# EAGLE board dcdc_0424 (EAGLE 9.6.2)
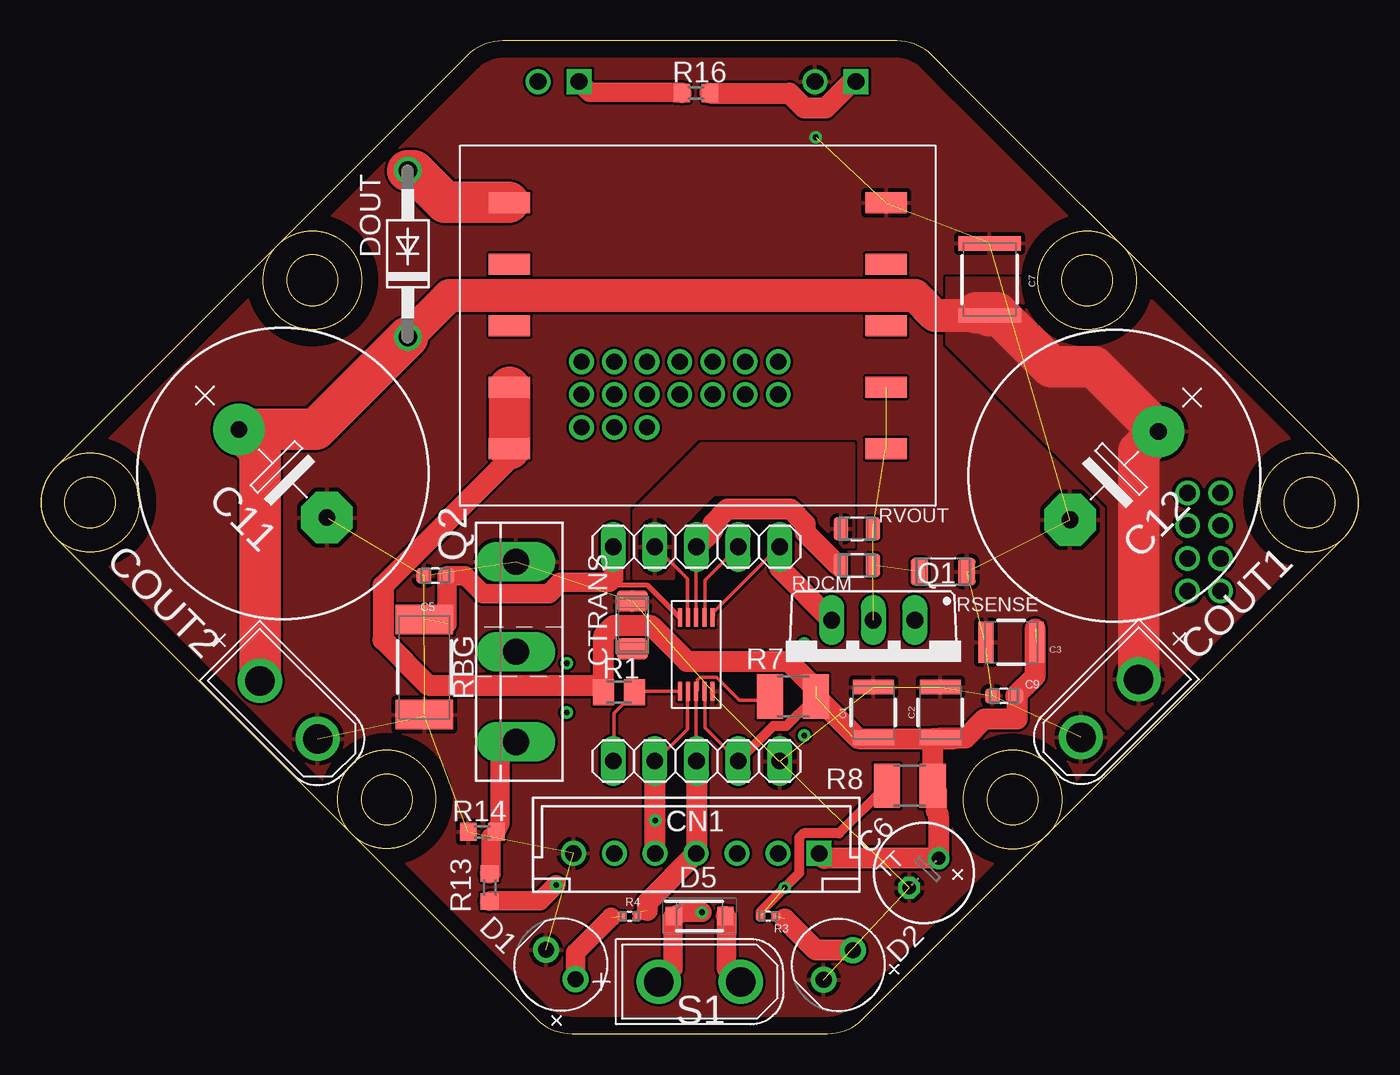
[diagram p0: board, top side]
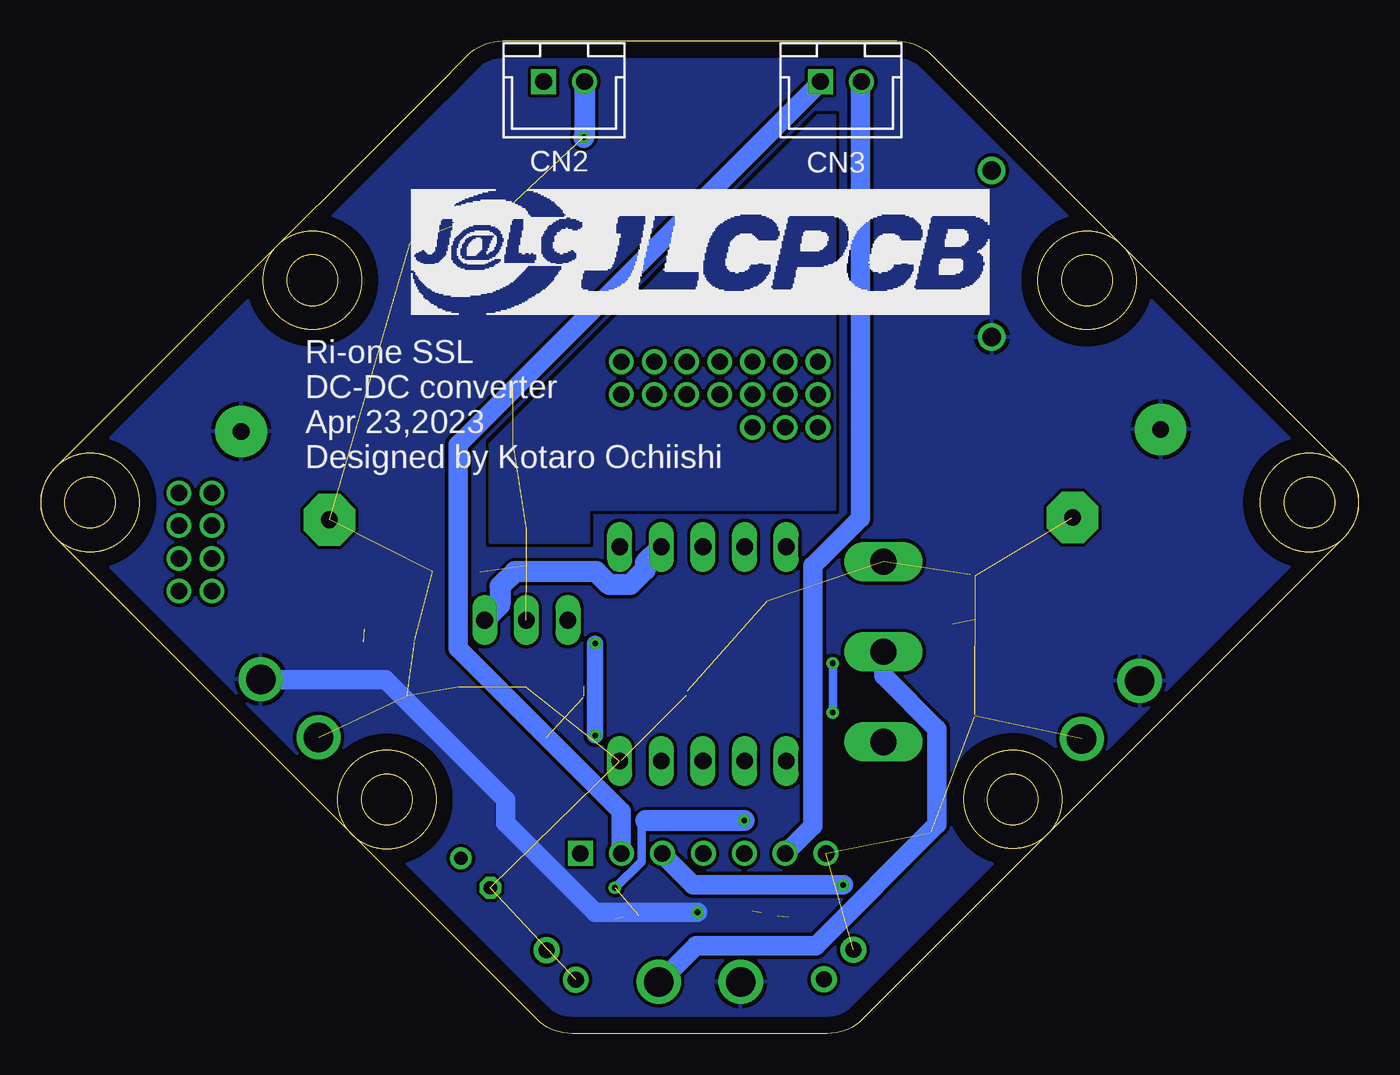
[diagram p1: board, bottom side, seen from below]

Size 80.43 x 60.58 mm. Coordinates in mm from the lower left corner, seen from the top.
Outline: 0.88,34.53 arc90 0.88,30.29
Outline: 30.29,0.88 arc45 32.41,0
Outline: 48.03,0 arc45 50.15,0.88
Outline: 79.56,30.29 arc90 79.56,34.53
Outline: 54.39,59.7 arc45 52.27,60.58
Outline: 28.17,60.58 arc45 26.05,59.7
Outline: 0.88,34.53 arc90 0.88,30.29
Outline: 0.88,30.29 17,14.16 30.29,0.88
Outline: 30.29,0.88 arc45 32.41,0
Outline: 32.41,0 48.03,0
Outline: 48.03,0 arc45 50.15,0.88
Outline: 50.15,0.88 63.43,14.16 79.56,30.29
Outline: 79.56,30.29 arc90 79.56,34.53
Outline: 79.56,34.53 70.67,43.41 56.39,57.7 54.39,59.7
Outline: 54.39,59.7 arc45 52.27,60.58
Outline: 52.27,60.58 28.17,60.58
Outline: 28.17,60.58 arc45 26.05,59.7
Outline: 26.05,59.7 0.88,34.53
Outline: circle at 3,32.41 radius 1.55
Outline: circle at 16.57,45.97 radius 3
Outline: circle at 3,32.41 radius 3
Outline: circle at 16.57,45.97 radius 1.55
Outline: circle at 21.12,14.29 radius 1.55
Outline: circle at 77.43,32.41 radius 1.55
Outline: circle at 59.32,14.29 radius 3
Outline: circle at 63.87,45.97 radius 3
Outline: circle at 77.43,32.41 radius 3
Outline: circle at 63.87,45.97 radius 1.55
Outline: circle at 59.32,14.29 radius 1.55
Outline: circle at 3,32.41 radius 1.55
Outline: circle at 16.57,45.97 radius 3
Outline: circle at 3,32.41 radius 3
Outline: circle at 16.57,45.97 radius 1.55
Outline: circle at 21.12,14.29 radius 1.55
Outline: circle at 77.43,32.41 radius 1.55
Outline: circle at 59.32,14.29 radius 3
Outline: circle at 63.87,45.97 radius 3
Outline: circle at 77.43,32.41 radius 3
Copper layers (1*16): Top 0.035mm / dielectric 1.5mm / Bottom 0.035mm
Design rules "default": minimum track width 6mil, minimum drill 0.35mm, track to track 6mil, track to pad 6mil, pad to pad 6mil, via to via 6mil, smd to smd 6mil, copper to edge 40mil, drill to drill 6mil, minimum pad ring 10mil, minimum via ring 8mil, stop-mask expansion 4mil, vias tented up to drill 0mil, thermal gap 10mil
Net classes: 0 default: width 0.2 mm, drill 0.1 mm; 1 New Class: width 1.2 mm, clearance 0.203 mm

## Footprints (pad centres in the part's own frame; a part is rotated, then mirrored left to right if it is on the bottom)
WCAP-CSGP_1210_H0.95 = smd 0.9 x 2.5: 1 -1.55,0; 2 1.55,0
CAP_0603 = smd 0.92 x 0.93: 1 -0.705,0; 2 0.705,0
TT2D6 = drill 0.813: + -1.27,0 | drill 0.813 octagon: - 1.27,0
WCAP-CSGP_1812_H1.25 = smd 0.9 x 3.8: 1 -2.2,0; 2 2.2,0
E7,5-18 = drill 1.016 pad 3.15: + -3.81,0 | drill 1.016 pad 3.15 octagon: - 3.81,0
B7B-XH-A = drill 1.016 square: 1 -7.5,0 | drill 1.016: 2 -5,0; 3 -2.5,0; 4 0,0; 5 2.5,0; 6 5,0; 7 7.5,0
B2B-XH-A = drill 1.016 square: 1 -1.25,0 | drill 1.016: 2 1.25,0
XT30UPB-M = drill 1.8: + 2.5,0; - -2.5,0
CAP_1206 = smd 1.29 x 1.91: 1 -1.46,0; 2 1.46,0
LEDRD254W60D565H860B_W = drill 0.981 pad 1.581: A -1.27,0; C 1.27,0
SODFL3618X110N = smd 1 x 1.13: 1 -1.575,0; 2 1.575,0
DO41-10 = drill 1.118: A 5.08,0; C -5.08,0
1X05 = drill 1.016 long: 1 -5.08,0; 2 -2.54,0; 3 0,0; 4 2.54,0; 5 5.08,0
TO220BV = drill 1.016 long: D 0,-2.54; G -2.54,-2.54; S 2.54,-2.54
TO-247AC = drill 1.6 long: D 0,0; G -5.5,0; S 5.5,0
M2012 = smd 1.3 x 1.6: 1 -0.95,0; 2 0.95,0
RES_0402 = smd 0.58 x 0.58: 1 -0.46,0; 2 0.46,0
R1210 = smd 1.6 x 2.7: 1 -1.4,0; 2 1.4,0
R0603 = smd 1 x 1.1: 1 -0.85,0; 2 0.85,0
WRIS_PSMC_2512_6.3X3.1X0.51X1.1(LXWXHXPW) = smd 1.8 x 3.5: 1 -2.9,0; 2 2.9,0
RES_0805 = smd 0.87 x 1.42: 1 -0.975,0; 2 0.975,0
RES_1206 = smd 1.08 x 1.68: 1 -1.445,0; 2 1.445,0
LT3750_2 = smd 1.15 x 0.25: CHARGE 0.5,1.5; DONE 0.5,2; GATE 5,1; GND 0.5,0.5; RBG 5,2.5; RDCM 5,1.5; RVOUT 5,2; SOURCE 5,0.5; VCC 0.5,1; VTRANS 0.5,2.5
32052 = smd 2.54 x 1.27: 1OUT 3,18.5; 2 3,14.75; 3 3,11; 4IN 3,7.25; 5IN 3,3.5; 6IN 26,3.5; 7IN 26,7.25; 8 26,11; 9 26,14.75; 10OUT 26,18.5

## Placement (x,y rotation side)
C1  22uF  [WCAP-CSGP_1210_H0.95]  50.81,19.6 90 top
C2  22uF  [WCAP-CSGP_1210_H0.95]  54.9,19.6 90 top
C3  22uF  [WCAP-CSGP_1210_H0.95]  59.23,23.89 180 top
C5  51pF  [CAP_0603]  24.08,27.94 180 top
C6  [TT2D6]  53.9,9.8 225 top
C7  0.1uF  [WCAP-CSGP_1812_H1.25]  57.91,46.02 270 top
C9  0.1uF  [CAP_0603]  58.79,20.61 180 top
C11  220uF 350v  [E7,5-18]  14.77,34.18 315 top
C12  220uF 350v  [E7,5-18]  65.52,34.05 225 top
CN1  [B7B-XH-A]  40,11 180 top
CN2  [B2B-XH-A]  48.5,58.1 0 bottom
CN3  [B2B-XH-A]  31.6,58.1 0 bottom
COUT1  XT30UPB-M  [XT30UPB-M]  65.25,19.85 45 top
COUT2  XT30UPB-M  [XT30UPB-M]  15.13,19.76 135 top
CTRANS  0.1uF 50v  [CAP_1206]  36.1,24.94 90 top
D1  [LEDRD254W60D565H860B_W]  31.74,4.21 135 top
D2  [LEDRD254W60D565H860B_W]  48.68,4.19 225 top
D5  GS1010FL  [SODFL3618X110N]  40.21,7.18 0 top
DOUT  1N4004  [DO41-10]  22.39,47.59 90 top
LEFT1  PINHD-1X5  [1X05]  40.02,16.63 0 top
Q1  NMOSFET  [TO220BV]  50.81,22.69 180 top
Q2  IRFP150NPBF  [TO-247AC]  29,23.3 90 top
R1  0Ω  [M2012]  35.29,20.84 0 top
R3  1kΩ  [RES_0402]  44.39,7.16 180 top
R4  1kΩ  [RES_0402]  35.94,7.16 0 top
R7  100kΩ  [R1210]  45.91,20.58 0 top
R8  100kΩ  [R1210]  53.04,15.13 180 top
R13  100  [R0603]  27.4,8.92 90 top
R14  1k  [R0603]  26.94,12.31 0 top
R16  20k  [R0603]  39.98,57.4 0 top
RBG  2.49kΩ  [WRIS_PSMC_2512_6.3X3.1X0.51X1.1(LXWXHXPW)]  23.41,22.36 270 top
RDCM  40.2kΩ  [RES_0805]  49.82,28.57 0 top
RIGHT  PINHD-1X5  [1X05]  40.02,29.71 0 top
RSENSE  0.01Ω  [RES_1206]  55.07,28.19 0 top
RVOUT  60.4kΩ  [RES_0805]  49.82,30.81 0 top
S1  XT30UPB-M  [XT30UPB-M]  40.22,3.16 180 top
U$1  LT3750_2  [LT3750_2]  41.5,20.39 90 top
U$2  [32052]  25.6,32.2 0 top

## Library data of the parts
C1-C3 = Wurth_Capacitors_WCAP-CSGP; CERAMIC-TYPE: NP0 Class I; DATASHEET-URL: https://www.we-online.com/redexpert/spec/885012009002?ae; DF: -; HEIGHT: 0.95mm; MOUNT: SMT; OPERATING-TEMPERATURE: -55 up to +125 °C; PART-NUMBER: 885012009002; QMIN: 1000; RISO: 10GOhm; SIZE: 1210; TECHNICAL-REFERENCE: NP01210102J025DFCT10000; VR: 25V(DC)
C5 C9 = Resistor_Capacitor; CREATED_BY: PCBLayout.com; DIGIKEY_PART_NUMBER: 399-7814-2-ND; MANUFACTURER: KEMET; MPN: C0603C100C5GACTU; PACKAGE: SMD 0603
C6 = rcl; SPICEPREFIX: C
C7 = Wurth_Capacitors_WCAP-CSGP; CERAMIC-TYPE: NP0 Class I; DATASHEET-URL: https://www.we-online.com/redexpert/spec/885012010001?ae; DF: -; HEIGHT: 1.25mm; MOUNT: SMT; OPERATING-TEMPERATURE: -55 up to +125 °C; PART-NUMBER: 885012010001; QMIN: 1000; RISO: 10GOhm; SIZE: 1812; TECHNICAL-REFERENCE: NP01812102J016DFCT10000; VR: 16V(DC)
C11 C12 = BeagleBone_Blue_R3
CN1-CN3 = jst-xh
COUT1 COUT2 S1 = amass
CTRANS = Resistor_Capacitor; CREATED_BY: PCBLayout.com; DIGIKEY_PART_NUMBER: GRM31CR60J107ME39L; MANUFACTURER: Murata Electronics North America; MPN: GRM31CR60J107ME39L; PACKAGE: SMD 1206
D1 D2 = Opto-Electronic
D5 = GS1010FL; DESCRIPTION: Surface general purpose rectifier; HEIGHT: 1.1mm; MANUFACTURER_NAME: PANJIT; MANUFACTURER_PART_NUMBER: GS1010FL
DOUT = diode
LEFT1 RIGHT = Connector; CATEGORY: CONNECTOR; SUB-CATEGORY: PIN-HEADER
Q1 = Tinkercad; CATEGORY: Transistor; SUB-CATEGORY: MOSFET; TYPE: N-Channel
Q2 = Transistor; CREATED_BY: PCBLayout.com; DIGIKEY_PART_NUMBER: IRFP150NPBF-ND; MANUFATURER: Infineon Technologies; MPN: IRFP150NPBF; PACKAGE: TO-247AC
R1 R7 R8 = BeagleBone_Black_Wireless
R3 R4 = Resistor_Capacitor; CREATED_BY: PCBLayout.com; DIGIKEY_PART_NUMBER: 311-0.0JRTR-ND; MANUFACTURER: Yageo; MPN: RC0402JR-070RL; PACKAGE: SMD 0402
R13 R14 R16 = rcl; SPICEPREFIX: R
RBG = Wurth_Resistor_WRIS-PSMC; DATASHEET-URL: https://katalog.we-online.de/pbs/datasheet/580070763005.pdf; IR: 20A; MOUNT: SMT; PART-NUMBER: 580070763005; PRATED: 2W; TCR: ±100ppm/ °C; TECHNICAL-REFERENCE: MC2512R005F201KAATE0000
RDCM RVOUT = Resistor_Capacitor; CREATED_BY: PCBLayout.com; DIGIKEY_PART_NUMBER: 541-0.0ATR-ND; MANUFACTURER: Vishay Dale; MPN: CRCW08050000Z0EA; PACKAGE: SMD 0805
RSENSE = Resistor_Capacitor; CREATED_BY: PCBLayout.com; DIGIKEY_PART_NUMBER: WSLP-.05TR-ND; MANUFACTURER: Vishay Dale; MPN: WSLP1206R0500FEA; PACKAGE: SMD 1206
U$1 U$2 = boostTest1215

## Nets
2 [New Class]: D5.2 Q2.D S1.-
+5V [New Class]: CN1.2 CN3.1 R16.1
CHRAGE: CN1.4 LEFT1.3 R4.2 R7.1 U$1.CHARGE
DONE: CN1.5 LEFT1.2 R3.2 R8.2 U$1.DONE
DRAIN [New Class]: Q1.D RDCM.2 RSENSE.1 RVOUT.2 U$2.6IN U$2.7IN
GATE: Q1.G RIGHT.4 U$1.GATE
GND: C1.2 C2.2 C3.2 C5.2 C6.- C7.1 C9.2 C11.- C12.- CN1.7 CN2.2 COUT1.- COUT2.- CTRANS.2 D1.C D2.C LEFT1.5 Q2.S R14.1 RBG.2 RSENSE.2 U$1.GND U$2.10OUT
N$1 [New Class]: CN1.3 R13.1
N$7 [New Class]: DOUT.A U$2.1OUT
N$11 [New Class]: D1.A R4.1
N$15 [New Class]: D2.A R3.1
N$21 [New Class]: Q2.G R13.2 R14.2
N$22 [New Class]: CN2.1 R16.2
RBG: C5.1 RBG.1 RIGHT.1 U$1.RBG
RDCM: RDCM.1 RIGHT.3 U$1.RDCM
RVOUT: RIGHT.2 RVOUT.1 U$1.RVOUT
SOURCE: Q1.S RIGHT.5 U$1.SOURCE
TR_SIG [New Class]: CN1.6 CN3.2
V+ [New Class]: C7.2 C11.+ C12.+ COUT1.+ COUT2.+ D5.1 DOUT.C S1.+
VCC: C1.1 C2.1 C3.1 C6.+ C9.1 CN1.1 LEFT1.4 R1.1 R7.2 R8.1 U$1.VCC U$2.4IN U$2.5IN
VTRANS: CTRANS.1 LEFT1.1 R1.2 U$1.VTRANS

## Tracks (layer width: path | path; a pad name or v marks a point on that pad's centre or on a via)
2
  Top 1.2: D5.2 41.85,7.14 41.85,3.96 42.64,3.17 S1.-
  Bottom 1.2: Q2.D 28.98,23.26 28.98,21.85 25.73,18.59 25.73,12.77 33.13,5.37 40.44,5.37 42.64,3.17 S1.-
+5V
  Top 1.2: R16.1 39.12,57.44 33.48,57.44 32.86,58.06 CN3.1
  Bottom 1.2: CN1.2 45.02,11.01 45.02,13.57 54.97,23.52 54.97,35.95 32.86,58.06 CN3.1
CHRAGE  (1 unrouted)
  Top 0.2: 36.47,7.4 36.47,7.22 R4.2 | 40,10.92 CN1.4 40,11.01 | R7.1 44.45,20.35 42.64,20.35 41.23,21.76 40.26,21.76 40.09,21.58 40.09,20.97 U$1.CHARGE 40,16.65 LEFT1.3 40,16.56
  Top 1.27: LEFT1.3 40.02,11.04 40,11.01 | CN1.4 37,8 37,7.5
DONE  (via drill 0.35)  (1 unrouted)
  Top 0.2: U$1.DONE 39.47,20.88 39.47,18.59 37.53,16.65 LEFT1.2 37.53,16.56 | 43.96,7.22 R3.2 | 51.63,15.06 R8.2
  Top 0.61: R8.2 48.73,12.22 46.55,12.22 46.28,11.95 46.28,9.8 43.93,7.45 R3.2
  Top 1.27: CN1.5 v37.5,13 37.5,16.62 37.53,16.65
  Bottom 0.508: 43.5,13 43.78,12.72 43.78,10.49 45.38,8.9 v45.4,8.9
  Bottom 1.27: v37.5,13 43.5,13
DRAIN  (5 unrouted)
  Top 1.2: 51.54,35.68 U$2.6IN
  pour Bottom: 32,52 32,32 47,32 47,30 53,30 53,36 33,56 32,56
GATE
  Top 0.2: U$1.GATE 40.53,25.46 40.53,27.66 42.55,29.69 RIGHT.4
  Bottom 1.27: RIGHT.4 43.55,28.72 43.55,28.31 44.46,27.4 45.74,27.4 46.54,28.2 51.5,28.2 52.41,27.29 52.41,26.17 Q1.G
GND  (via drill 0.35)  (22 unrouted)
  Top 0.2: 51.63,50.66 U$2.10OUT 51.54,50.75 | 57.88,48.28 C7.1 | 58.06,20.61 C9.2 | 54.97,21.14 C2.2 54.89,21.14 | 50.83,21.14 C1.2 | 57.62,23.96 C3.2 57.62,23.88 | 23.7,28.02 23.43,28.02 C5.2 | 36.03,26.43 CTRANS.2 | 41.05,20.61 41.05,20.88 U$1.GND | 45.02,16.65 LEFT1.5 45.02,16.56 | 26.08,12.33 R14.1 26.17,12.25 | 23.43,19.38 RBG.2 23.35,19.38
  Bottom 0.2: 17.53,31.45 C11.- | 28.98,28.81 Q2.S
  Bottom 1.27: CN2.2 47.25,54.75 v47.3,54.7
  pour Top (rank 3): 30.5,43.5 30.5,32 35.5,32 40,36.5 50,36.5 50,22.5 52,22.5 52,26.5 52.5,27 55,27 55,42 50,42 49.5,42.5 49.5,43.5
  pour Top (rank 4): -10,70 -10,-10 90,-10 90,60 90,70
N$1  (via drill 0.35)
  Top 1.2: v31.45,9.07 30.48,8.11 27.49,8.11 R13.1
  Bottom 1.2: v31.45,9.07 40.61,9.07 42.46,10.92 CN1.3
N$2  (via drill 0.35)
  Bottom 0.508: v32.1,22.6 v32.1,19.6
N$3  (via drill 0.35)
  Bottom 1.016: v46.6,23.8 v46.6,18.2
N$4  (via drill 1)
  other vias: 33,41
N$5  (via drill 1)
  other vias: 33,39
N$6  (via drill 1)
  other vias: 33,37
N$7
  Top 1.2: 24.67,50.75 22.89,52.53 DOUT.A | 28.54,50.75 U$2.1OUT
  Top 2.54: DOUT.A 22.74,52.67 24.67,50.75 28.54,50.75
N$8  (via drill 1)
  other vias: 35,37
N$10  (via drill 1)
  other vias: 35,39
N$11  (1 unrouted)
  Top 1.2: D1.A 32.64,4.94 34.8,7.1
N$12  (via drill 1)
  other vias: 35,41
N$13  (via drill 1)
  other vias: 37,41
N$14  (via drill 1)
  other vias: 37,39
N$15  (1 unrouted)
  Top 1.27: D2.A 47.31,5.09 45.4,7
N$16  (via drill 1)
  other vias: 37,37
N$17  (via drill 1)
  other vias: 39,41
N$18  (via drill 1)
  other vias: 39,39
N$19  (via drill 1)
  other vias: 41,41
N$20  (via drill 1)
  other vias: 41,39
N$21
  Top 1.2: R13.2 27.49,9.78 27.49,11.98 27.75,12.25 R14.2 28.02,12.86 28.02,16.83 28.98,17.8 Q2.G
N$22
  Top 1.27: CN2.1 49.51,58.1 47.91,56.5 46.59,56.5 45.69,57.4 R16.2
N$23  (via drill 1)
  other vias: 70,33
N$24  (via drill 1)
  other vias: 70,31
N$25  (via drill 1)
  other vias: 70,29
N$26  (via drill 1)
  other vias: 70,27
N$27  (via drill 1)
  other vias: 72,27
N$28  (via drill 1)
  other vias: 72,29
N$29  (via drill 1)
  other vias: 72,31
N$30  (via drill 1)
  other vias: 72,33
N$31  (via drill 1)
  other vias: 43,41
N$32  (via drill 1)
  other vias: 43,39
N$33  (via drill 1)
  other vias: 45,39
N$34  (via drill 1)
  other vias: 45,41
RBG  (1 unrouted)
  Top 0.2: 23.43,25.29 RBG.1 | 38.94,25.46 U$1.RBG
  Top 0.305: U$1.RBG 37.04,27.35 34.9,27.35 34.94,27.39 RIGHT.1
  Top 1.2: 24.8,25 24.8,27.93 C5.1 25.9,27.94 26.99,26.85 31.01,26.85 31.69,27.53 34.72,27.53 34.94,27.76 RIGHT.1
RDCM
  Top 0.2: U$1.RDCM 40,25.46 40,29.69 RIGHT.3 | 48.6,28.63 48.81,28.63 RDCM.1
  Top 1.27: RIGHT.3 41.01,30.7 41.01,31.11 41.92,32.02 45.74,32.02 46.65,31.11 46.65,30.58 48.6,28.63
RVOUT
  Top 0.2: U$1.RVOUT 39.47,25.46 39.47,27.75 37.53,29.69 RIGHT.2 37.71,29.6 | 48.81,30.84 RVOUT.1
  pour Top: 36.2,27.9 36.2,31.9 40.3,36 49.5,36 49.6,36 49.6,29.7 49,29.7 47.5,31.2 47.5,31.5 46.1,32.9 41.1,32.9 38.6,30.4 38.6,27.8 36.2,27.8
SOURCE
  Top 0.2: 44.4,29.07 45.02,29.69 RIGHT.5 44.4,29.07 | 44.4,29.07 41.05,25.73 41.05,25.46 U$1.SOURCE | 44.4,29.07 48.19,25.29 Q1.S
  Top 1.27: Q1.S 45.1,28.4 RIGHT.5
TR_SIG
  Bottom 1.2: CN3.2 30.39,58.06 30.39,31.45 33.3,28.54 33.3,12.69 34.98,11.01 CN1.6
V+  (via drill 0.35)
  Top 1.2: 13.39,21.58 COUT2.+ | S1.+ 37.8,3.17 38.59,3.96 38.59,7.14 D5.1 39.2,7.4 v40.35,7.4 | 57.97,43.79 C7.2 | 68.19,36.83 C12.+ | 67.04,21.67 COUT1.+
  Top 2: C7.2 54.59,43.82 53.37,45.04 24.92,45.04 DOUT.C
  Top 2.54: DOUT.C 16.75,36.87 C11.+ 13.39,35.56 13.39,21.58 | 58.09,44 57.1,44 | COUT1.+ 67.02,35.55 C12.+ 64.28,40.68 61.67,40.68 58.36,44 58.09,44 | C7.2 58.09,44
  Bottom 1.2: v40.35,7.4 46.6,7.4 52.07,12.86 52.07,14.27 59.38,21.58 66.96,21.58 COUT1.+
  pour Bottom (rank 2): 0,60 0,0 80,0 80,60
  pour Top: 55.4,42 65.2,32.2 65.2,19.7 70.9,14 70.9,13.9 83,26 83,38 74.9,46.1 55.3,46.1 55.3,42.1
VCC  (3 unrouted)
  Top 0.2: 59.56,20.61 C9.1 59.47,20.53 59.2,20.53 | 60.7,23.88 C3.1 | 50.83,18.06 C1.1 50.75,18.06 49.6,18.06 | 54.89,18.06 C2.1 | 54.97,18.06 C2.1 | U$1.VCC 40.53,20.88 40.53,18.68 42.55,16.65 LEFT1.4 | 54.71,14.8 54.45,15.06 R8.1 54.36,15.15 | 54.36,17.97 54.38,17.98 C2.1 | 34.36,21.1 34.36,20.88 R1.1 | 47.31,20.53 47.31,20.35 R7.2 47.37,20.3 | 28.54,35.68 U$2.5IN
  Top 0.61: LEFT1.4 44.7,18.77 45.5,18.77 47.02,20.3 47.37,20.3
  Top 1.27: CN1.1 47.8,10.7 C6.+ 54.8,13.11 54.72,13.54 54.66,13.61 54.66,14.91 R8.1 54.44,17.94 54.5,18 | 34.36,21.1 34.2,21.26 23.64,21.26 20.87,24.03 20.87,27.34 28.6,35.07 U$2.5IN | R1.1 34.36,20.86 34.36,24.3 34.97,24.91 37.23,24.91 39.43,22.72 45.64,22.72 47.15,21.2 47.3,21.2 | R7.2 49.89,18 54.5,18 | 54.5,18 55.7,18 55.67,17.98 54.38,17.98 | C2.1 56.45,18.05 57.6,19.2 59.6,19.2 59.6,20.57 59.56,20.61 | C9.1 60.7,21.82 60.7,24.7
  Top 2.54: U$2.4IN U$2.5IN
  Bottom 0.2: 42.64,16.56 LEFT1.4
VTRANS
  Top 0.2: U$1.VTRANS 38.94,20.88 36.3,20.88 R1.2 | CTRANS.1 36.12,23.43 36.12,21.14 36.3,20.97 R1.2 | LEFT1.1 34.98,16.65 34.98,19.56 36.21,20.79 R1.2

## Text on the board
bNames: Ri-one SSL / DC-DC converter / Apr 23,2023 / Designed by Kotaro Ochiishi